# Allegro board PCB_ESP32-P4_HMI_SubBoard_V1.2_20240527.brd
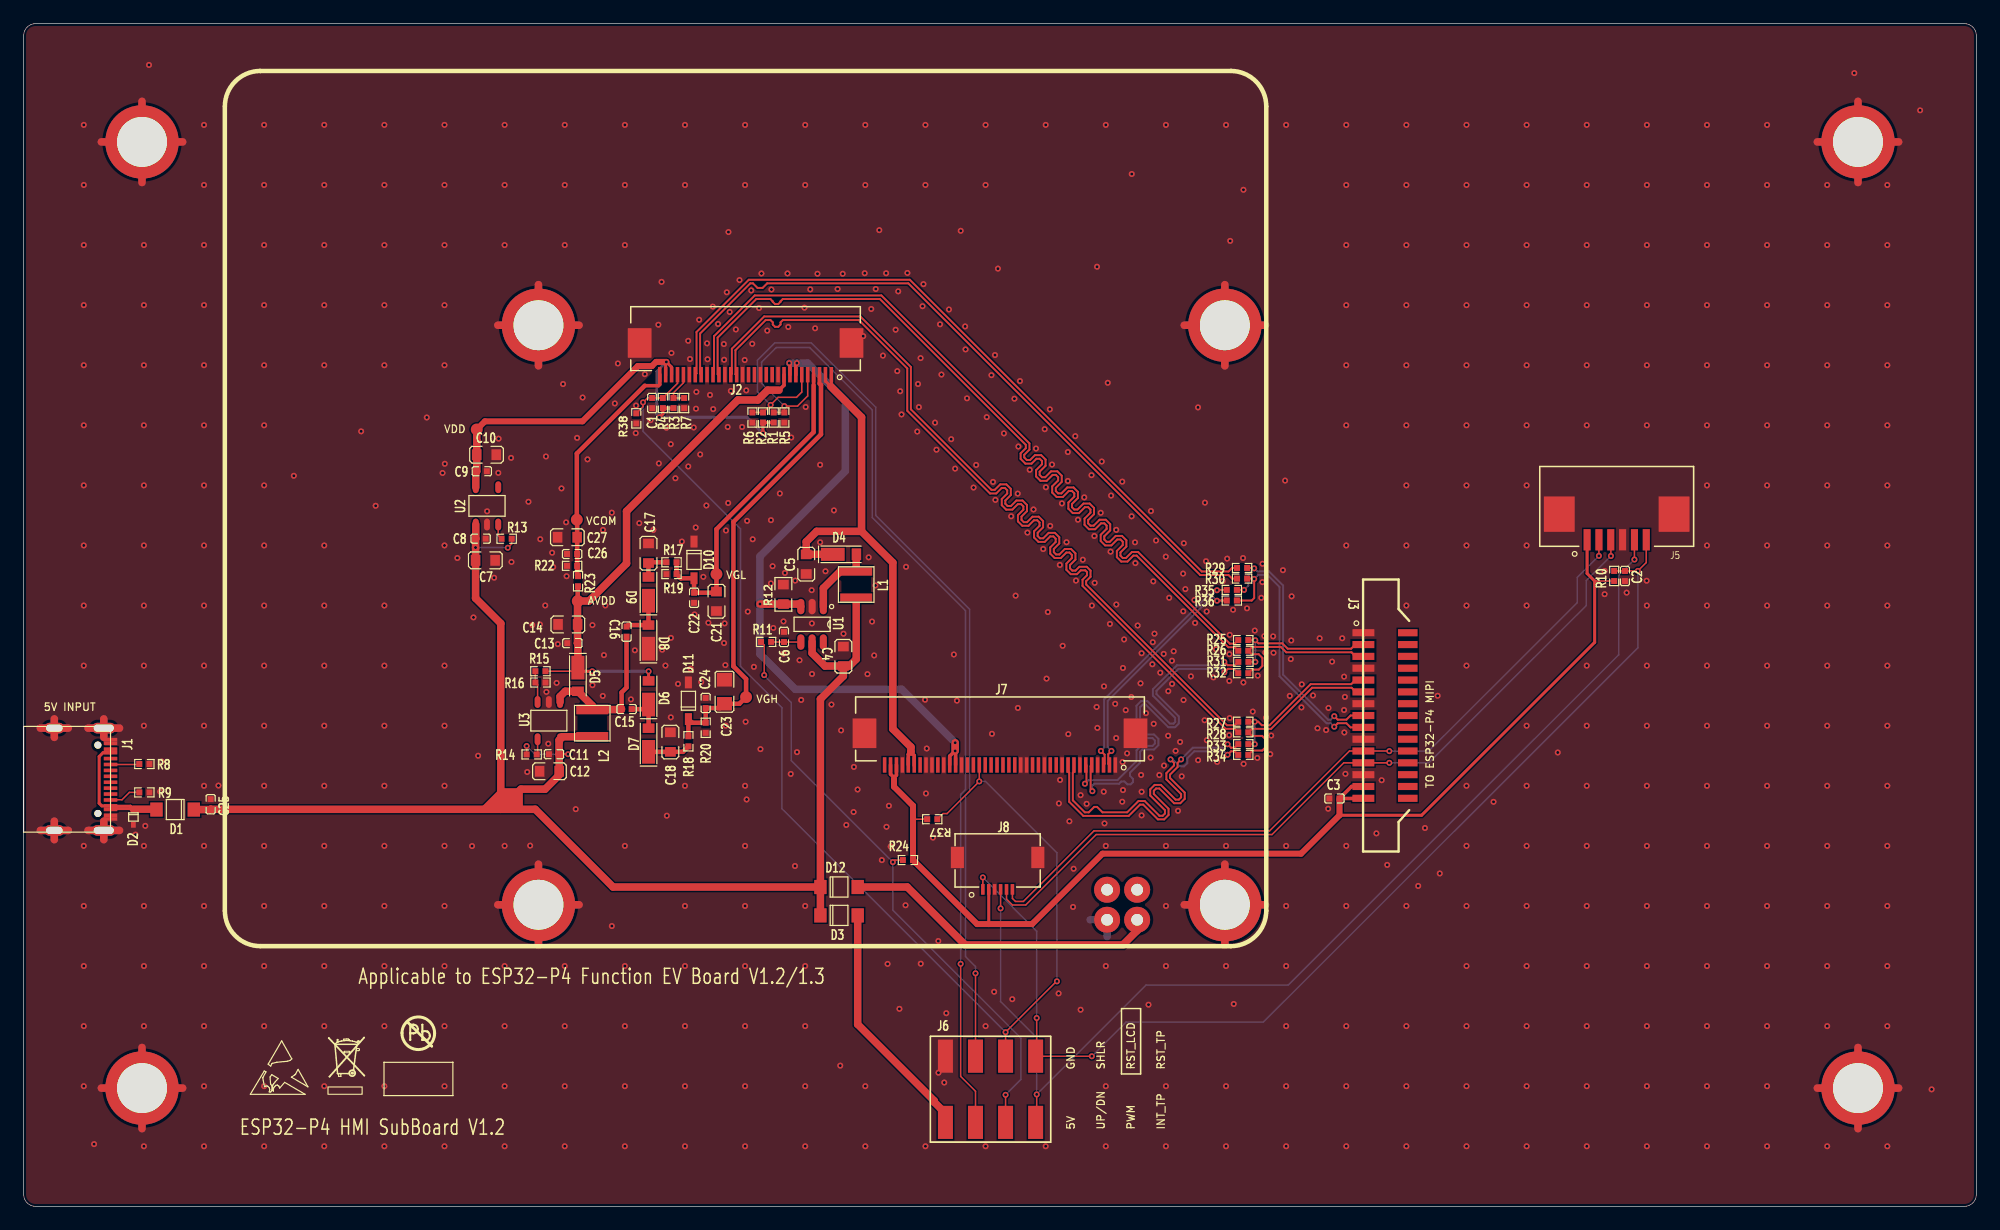
[diagram p0: board, top side]
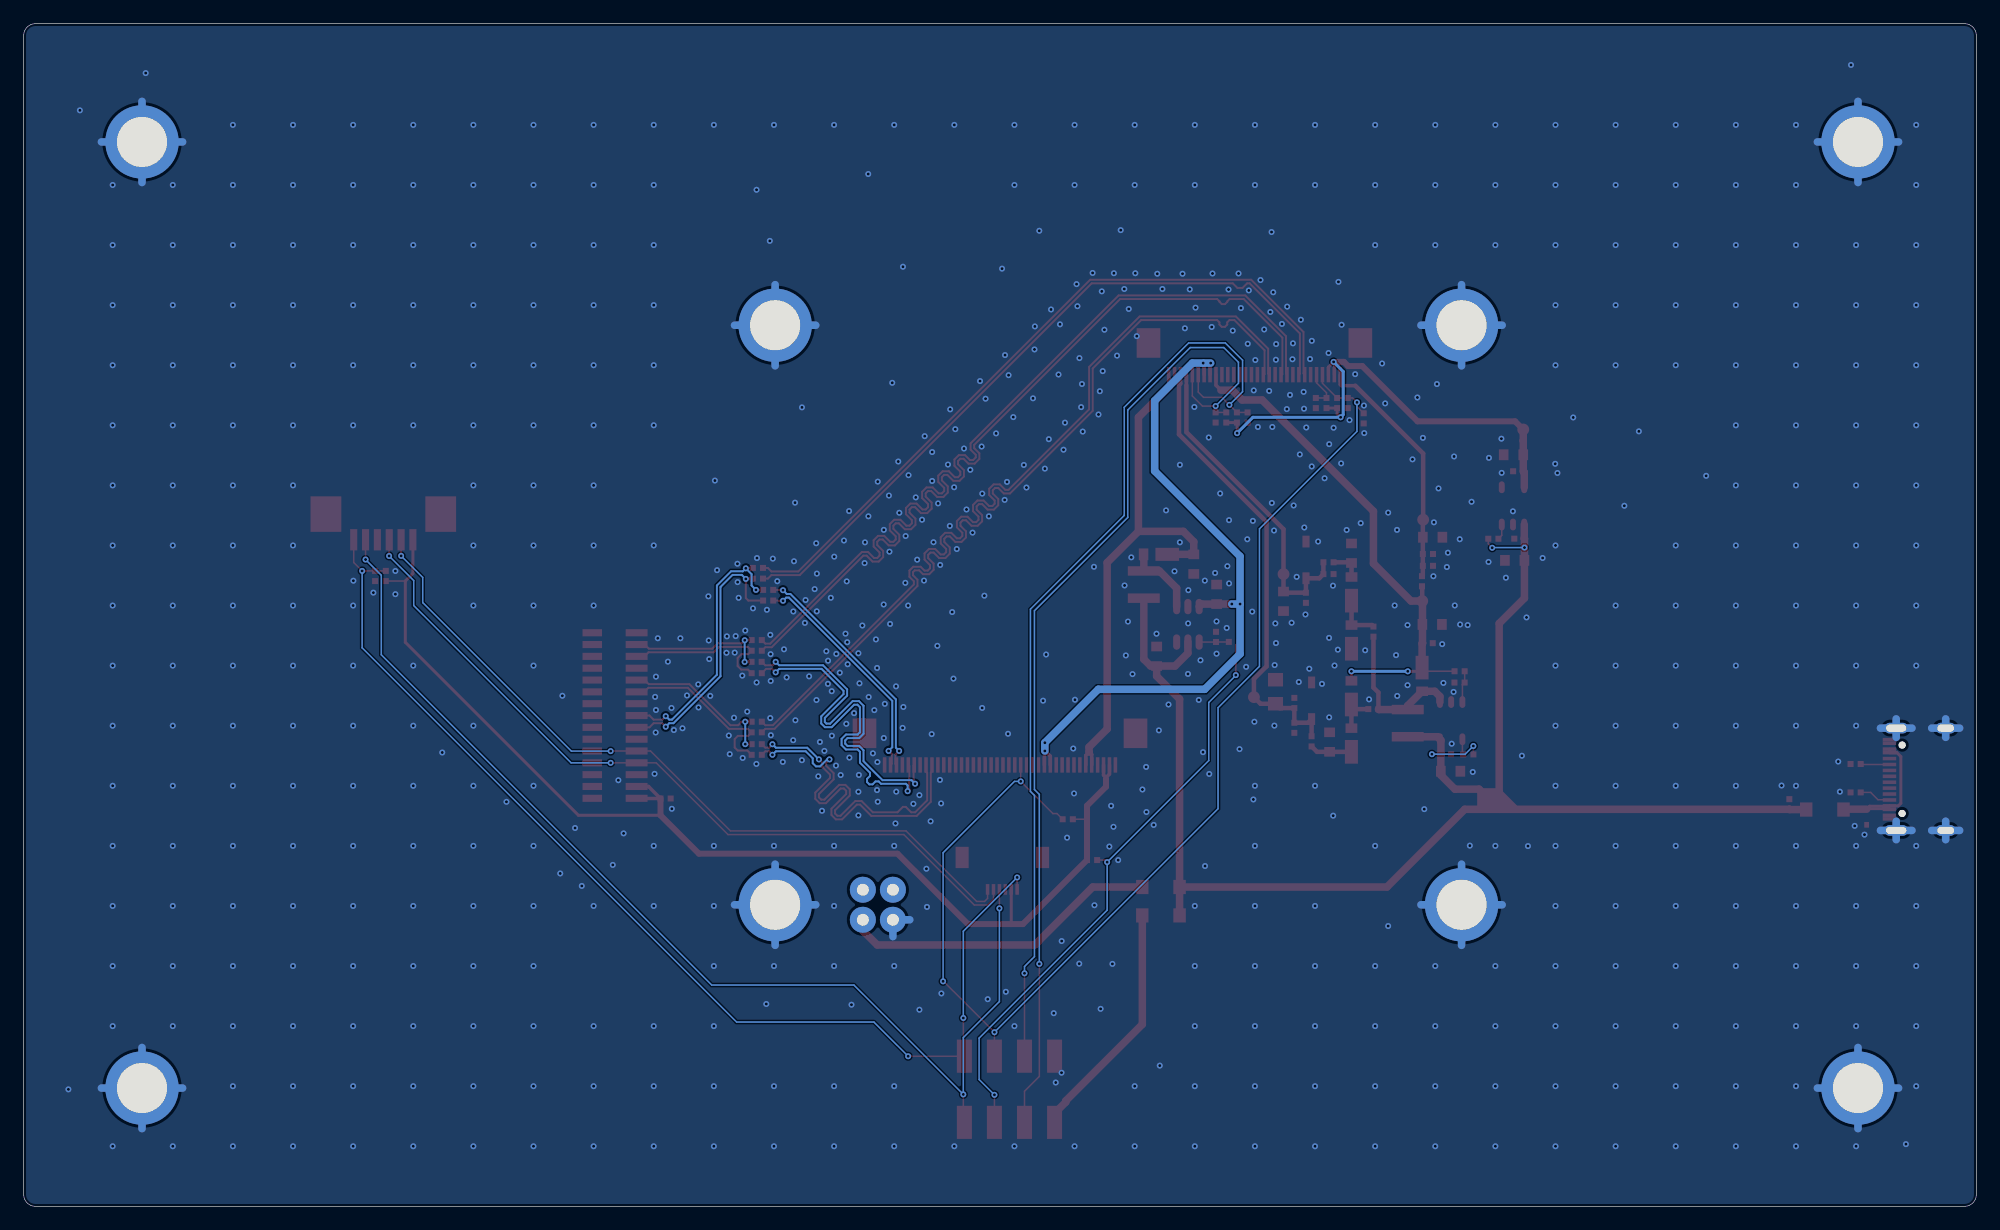
[diagram p1: board, bottom side, seen from below]

Outline 165 x 100 mm; copper layers: TOP, BOTTOM. Coordinates in mm from the lower left corner of the outline.
Outline path: 0,99 0,1 arc(0.29,0.29) 1,0 164,0 arc(164.71,0.29) 165,1 165,99 arc(164.71,99.71) 164,100 1,100 arc(0.29,99.71) 0,99

## Design rules (mm)
net group A_CLKN: nets A_CLKN B_CLKN ESP32_CLKN
net group A_CLKP: nets A_CLKP B_CLKP ESP32_CLKP
net group A_DATN0: nets A_DATN0 B_DATN0 ESP32_DATN0
net group A_DATN1: nets A_DATN1 B_DATN1 ESP32_DATN1
net group A_DATP0: nets A_DATP0 B_DATP0 ESP32_DATP0
net group A_DATP1: nets A_DATP1 B_DATP1 ESP32_DATP1

## Placement (name value [footprint] x y rotation side)
C1  1uF/16V(10%)(NC)  [C0402]  53.11 67.92 270 top
C2  1uF/16V(10%)  [C0402]  135.31 53.3 270 top
C3  0.1uF/50V(10%)  [C0402]  110.76 34.48 180 top
C4  10uF/25V(20%)  [C0603]  69.26 46.51 90 top
C5  10uF/25V(20%)  [C0603]  66.13 54.3 270 top
C6  22pF/50V(5%)  [C0402]  64.25 48.15 90 top
C7  10uF/25V(20%)  [C0603]  39.01 54.62 0 top
C8  0.1uF/50V(10%)  [C0402]  38.61 56.45 0 top
C9  0.1uF/50V(10%)  [C0402]  38.71 62.15 0 top
C10  10uF/25V(20%)  [C0603]  39.11 63.55 0 top
C11  0.1uF/50V(10%)  [C0402]  44.81 38.23 180 top
C12  10uF/25V(20%)  [C0603]  44.43 36.79 180 top
C13  0.1uF/50V(10%)  [C0402]  46.36 47.62 180 top
C14  10uF/25V(20%)  [C0603]  45.98 49.2 180 top
C15  0.1uF/50V(10%)  [C0402]  50.95 42.04 180 top
C16  0.1uF/50V(10%)  [C0402]  50.94 48.59 270 top
C17  1uF/50V(10%)  [C0603]  52.8 55.22 90 top
C18  1uF/50V(10%)  [C0603]  54.65 39.26 90 top
C21  10uF/25V(20%)  [C0603]  58.54 51.16 270 top
C22  0.1uF/50V(10%)  [C0402]  56.65 51.46 270 top
C23  10uF/50V(20%)  [C0805]  59.22 43.51 90 top
C24  0.1uF/50V(10%)  [C0402]  57.63 42.56 90 top
C25  0.1uF/50V(10%)  [C0402]  15.8 34 90 top
C26  0.1uF/50V(10%)  [C0402]  46.34 55.16 180 top
C27  10uF/25V(20%)  [C0603]  45.94 56.57 180 top
D1  DSS24  [SOD123FL]  12.8 33.55 180 top
D2  LESD5D5.0CT1G  [SOD523]  9.27 32.92 90 top
D3  DSS24  [SOD123FL]  68.9 24.6 0 top
D4  LMBR140ET1G  [SOD323HE]  69.37 55.13 180 top
D5  LMBR140ET1G  [SOD323HE]  46.83 44.55 90 top
D6  LMBR140ET1G  [SOD323HE]  52.8 43.43 270 top
D7  LMBR140ET1G  [SOD323HE]  52.8 39.43 270 top
D8  LMBR140ET1G  [SOD323HE]  52.8 48.15 270 top
D9  LMBR140ET1G  [SOD323HE]  52.8 52.21 270 top
D10  LMSZ5233BT1G  [SOD123]  56.64 54.66 270 top
D11  MM1W18  [SOD123]  56.17 42.75 90 top
D12  DSS24(NC)  [SOD123FL]  68.9 27 0 top
H1  STD  [HOLE6P2_4P22]  43.5 25.5 0 top
H2  STD  [HOLE6P2_4P22]  101.5 25.5 0 top
H3  STD  [HOLE6P2_4P22]  101.5 74.5 0 top
H4  STD  [HOLE6P2_4P22]  43.5 74.5 0 top
H5  STD  [HOLE6P2_4P22]  155 10 0 top
H6  STD  [HOLE6P2_4P22]  10 90 0 top
H7  STD  [HOLE6P2_4P22]  155 90 0 top
H8  STD  [HOLE6P2_4P22]  10 10 0 top
J1  -  [USB_TYPEC_16P_F]  6.27 36.11 270 top
J2  FPC_30P  [FFC30P_0P5]  61 73 180 top
J3  DSI_1-1734248-5  [FFC_15P_1_MIPI]  115.08 41.5 90 top
J5  FPC_6P  [FFC6P_1_UP]  134.61 58.53 180 top
J6  CON4X2  [CON4X2_2P54_SMT]  81.7 9.9 0 top
J7  FPC_40P(NC)  [FFC40P_0P5]  82.5 40 180 top
J8  FPC_6P(NC)  [FFC6P_0P5_UP]  82.3 29.5 180 top
L1  10uH(20%)_0.8A  [L3012S]  70.35 52.57 90 top
L2  10uH(20%)_0.8A  [L3012S]  48.05 40.85 90 top
R1  10K(1%)  [R0402]  63.38 66.7 270 top
R2  10K(1%)(NC)  [R0402]  62.48 66.7 270 top
R3  10K(1%)  [R0402]  54.91 67.92 270 top
R4  10K(1%)(NC)  [R0402]  54.01 67.92 270 top
R5  10K(1%)(NC)  [R0402]  64.28 66.7 90 top
R6  10K(1%)  [R0402]  61.58 66.7 90 top
R7  10K(1%)  [R0402]  55.81 67.92 90 top
R8  5.1K(1%)  [R0402]  10.2 37.4 180 top
R9  5.1K(1%)  [R0402]  10.2 35 180 top
R10  10K(1%)  [R0402]  134.4 53.3 270 top
R11  10K(1%)  [R0402]  62.74 47.73 180 top
R12  1.1(1%)  [R0603]  64.19 51.75 270 top
R13  10K(1%)  [R0402]  40.81 56.45 0 top
R14  10K(1%)  [R0402]  42.93 38.21 180 top
R15  22K(1%)  [R0402]  43.66 45.25 180 top
R16  3.3K(1%)  [R0402]  43.67 44.29 0 top
R17  220(1%)  [R0402]  54.74 54.46 0 top
R18  220(1%)  [R0402]  56.17 39.32 90 top
R19  51K(1%)  [R0402]  54.74 53.46 0 top
R20  51K(1%)  [R0402]  57.63 40.46 90 top
R22  1K(1%)  [R0402]  46.34 54.16 0 top
R23  2K(1%)  [R0402]  46.84 52.86 270 top
R24  10K(1%)  [R0402]  74.72 29.28 0 top
R25  0(1%)  [R0402]  103.06 47.88 0 top
R26  0(1%)  [R0402]  103.06 46.98 0 top
R27  0(1%)  [R0402]  103.06 40.98 0 top
R28  0(1%)  [R0402]  103.06 40.08 0 top
R29  0(1%)  [R0402]  102.96 53.98 0 top
R30  0(1%)  [R0402]  102.96 53.08 0 top
R31  0(1%)(NC)  [R0402]  103.07 46.04 0 top
R32  0(1%)(NC)  [R0402]  103.06 45.08 0 top
R33  0(1%)(NC)  [R0402]  103.06 39.08 0 top
R34  0(1%)(NC)  [R0402]  103.06 38.18 0 top
R35  0(1%)(NC)  [R0402]  102.09 52.12 0 top
R36  0(1%)(NC)  [R0402]  102.09 51.22 0 top
R37  1K(1%)(NC)  [R0402]  76.78 32.73 180 top
R38  10K(1%)  [R0402]  51.77 66.63 90 top
TP1  Test Point  [TPC1]  58.54 53.46 270 top
TP2  Test Point  [TPC1]  61.04 43.06 270 top
TP3  Test Point  [TPC1]  46.74 58.06 270 top
TP4  Test Point  [TPC1]  46.82 51.18 270 top
TP5  Test Point  [TPC1]  38.29 65.69 90 top
TP6  TEST_THP_CP  [HOLE2P2_1]  94.09 24.23 0 top
TP7  TEST_THP_CP  [HOLE2P2_1]  91.55 24.23 0 top
TP8  TEST_THP_CP  [HOLE2P2_1]  91.55 26.77 0 top
TP9  TEST_THP_CP  [HOLE2P2_1]  94.09 26.77 0 top
U1  ETA1611  [SOT23-6]  66.62 49.21 270 top
U2  ME6211C18M5G-N  [SOT23-5]  39.15 59.23 90 top
U3  AP3012K  [SOT23-5]  44.38 41.07 270 top

## Library data of the parts
C1 C2 = CAP
C3-C18 C21-C27 = CAPACITOR
D1 D3-D12 = DIODE_S
D2 = DIODE_BI_DIR
H1-H8 = STD
J1 = USB_TYPEC_16P_F
J2 = FPC_30P
J3 = DSI_1-1734248-5
J5 J8 = FPC_6P
J6 = CON4X2
J7 = FPC_40P
L1 L2 = INDUCTOR
R1-R20 R22-R24 R37 R38 = RESISTOR
R25-R30 = RESISTOR: signal model: RESISTOR_R0402_0(1%)_0(1%)
R31-R36 = RESISTOR: signal model: RESISTOR_R0402_0(1%)(NC)_0(1%)(NC)
TP1-TP9 = TEST POINT_0
U1 = ETA1611
U2 = LDO_SOT23-5_3
U3 = AP3012K

## Footprints (pads in the part's own frame, mm; a bottom-side part is the same pattern mirrored in y, then rotated)
C0402
  rect 0.508x0.508 smd: 1(-0.429,0) 2(0.429,0)
C0603
  rect 0.813x0.914 smd: 1(-0.826,0) 2(0.826,0)
C0805
  rect 1.143x1.27 smd: 1(-1.016,0) 2(1.016,0)
CON4X2_2P54_SMT
  rect 1.27x2.8 smd: 1(-3.81,-2.8) 2(-3.81,2.8) 3(-1.27,-2.8) 4(-1.27,2.8) 5(1.27,-2.8) 6(1.27,2.8) 7(3.81,-2.8) 8(3.81,2.8)
FFC6P_0P5_UP
  rect 0.3x0.9 smd: 1(1.25,2.7) 2(0.75,2.7) 3(0.25,2.7) 4(-0.25,2.7) 5(-0.75,2.7) 6(-1.25,2.7)
  rect 1.1x1.8 smd: 7(-3.4,0) 8(3.4,0)
FFC6P_1_UP
  rect 0.6x1.8 smd: 1(2.5,2.17) 2(1.5,2.17) 3(0.5,2.17) 4(-0.5,2.17) 5(-1.5,2.17) 6(-2.5,2.17)
  rect 2.6x3 smd: 7(-4.85,0) 8(4.85,0)
FFC30P_0P5
  rect 0.3x1.3 smd: 1(-7.25,2.68) 2(-6.75,2.68) 3(-6.25,2.68) 4(-5.75,2.68) 5(-5.25,2.68) 6(-4.75,2.68) 7(-4.25,2.68) 8(-3.75,2.68) 9(-3.25,2.68) 10(-2.75,2.68) 11(-2.25,2.68) 12(-1.75,2.68) 13(-1.25,2.68) 14(-0.75,2.68) 15(-0.25,2.68) 16(0.25,2.68) 17(0.75,2.68) 18(1.25,2.68) 19(1.75,2.68) 20(2.25,2.68) 21(2.75,2.68) 22(3.25,2.68) 23(3.75,2.68) 24(4.25,2.68) 25(4.75,2.68) 26(5.25,2.68) 27(5.75,2.68) 28(6.25,2.68) 29(6.75,2.68) 30(7.25,2.68)
  rect 2x2.5 smd: 31(-8.95,0) 32(8.95,0)
FFC40P_0P5
  rect 0.3x1.3 smd: 1(-9.75,2.68) 2(-9.25,2.68) 3(-8.75,2.68) 4(-8.25,2.68) 5(-7.75,2.68) 6(-7.25,2.68) 7(-6.75,2.68) 8(-6.25,2.68) 9(-5.75,2.68) 10(-5.25,2.68) 11(-4.75,2.68) 12(-4.25,2.68) 13(-3.75,2.68) 14(-3.25,2.68) 15(-2.75,2.68) 16(-2.25,2.68) 17(-1.75,2.68) 18(-1.25,2.68) 19(-0.75,2.68) 20(-0.25,2.68) 21(0.25,2.68) 22(0.75,2.68) 23(1.25,2.68) 24(1.75,2.68) 25(2.25,2.68) 26(2.75,2.68) 27(3.25,2.68) 28(3.75,2.68) 29(4.25,2.68) 30(4.75,2.68) 31(5.25,2.68) 32(5.75,2.68) 33(6.25,2.68) 34(6.75,2.68) 35(7.25,2.68) 36(7.75,2.68) 37(8.25,2.68) 38(8.75,2.68) 39(9.25,2.68) 40(9.75,2.68)
  rect 2x2.5 smd: 41(-11.45,0) 42(11.45,0)
FFC_15P_1_MIPI
  rect 0.6x1.85 smd: 1(7,1.875) 2(6,1.875) 3(5,1.875) 4(4,1.875) 5(3,1.875) 6(2,1.875) 7(1,1.875) 8(0,1.875) 9(-1,1.875) 10(-2,1.875) 11(-3,1.875) 12(-4,1.875) 13(-5,1.875) 14(-6,1.875) 15(-7,1.875)
  rect 0.6x1.65 smd: 16(7,-1.875) 17(6,-1.875) 18(5,-1.875) 19(4,-1.875) 20(3,-1.875) 21(2,-1.875) 22(1,-1.875) 23(0,-1.875) 24(-1,-1.875) 25(-2,-1.875) 26(-3,-1.875) 27(-4,-1.875) 28(-5,-1.875) 29(-6,-1.875) 30(-7,-1.875)
HOLE2P2_1
  round 2.2 hole 1: 1(0,0)
HOLE6P2_4P22
  round 6.2 hole 4.22: 1(0,0)
L3012S
  rect 0.8x2.7 smd: 1(-1.15,0) 2(1.15,0)
R0402
  rect 0.508x0.508 smd: 1(-0.429,0) 2(0.429,0)
R0603
  rect 0.813x0.914 smd: 1(-0.826,0) 2(0.826,0)
SOD123
  rect 1x0.6 smd: 1(1.55,0) 2(-1.55,0)
SOD123FL
  rect 1.05x1.2 smd: 1(1.575,0) 2(-1.575,0)
SOD323HE
  rect 0.8x1 smd: 1(-1,0)
  rect 2x1.1 smd: 2(1,0)
SOD523
  rect 0.48x0.4 smd: 1(-0.66,0) 2(0.66,0)
SOT23-5
  oval 1x0.5 smd: 1(-1.575,0.95) 2(-1.575,0) 3(-1.575,-0.95) 4(1.575,-0.95) 5(1.575,0.95)
SOT23-6
  oval 1.3x0.6 smd: 1(-1.5,0.95) 2(-1.5,0) 3(-1.5,-0.95) 4(1.5,-0.95) 5(1.5,0) 6(1.5,0.95)
TPC1
  round 1 smd: 1(0,0)
USB_TYPEC_16P_F
  round 0.6 hole 0.6 unplated: (-2.89,0) (2.89,0)
  rect 0.3x1.14 smd: 1(-3.35,1.07) 2(-3.05,1.07) 3(-2.55,1.07) 4(-2.25,1.07) 5(-1.75,1.07) 6(-1.25,1.07) 7(-0.75,1.07) 8(-0.25,1.07) 9(0.25,1.07) 10(0.75,1.07) 11(1.25,1.07) 12(1.75,1.07) 13(2.25,1.07) 14(2.55,1.07) 15(3.05,1.07) 16(3.35,1.07)
  oval 0.9x1.7 hole 0.6x1.4: 17(-4.325,-3.68) 20(4.325,-3.68)
  oval 0.9x2 hole 0.6x1.7: 18(-4.325,0.5) 19(4.325,0.5)

## Nets
GND: C1.2 C2.2 C3.2 C4.2 C5.2 C6.2 C7.2 C8.2 C9.2 C10.2 C11.2 C12.2 C13.2 C14.2 C17.2 C18.2 C21.2 C22.2 C23.2 C24.2 C25.2 C26.2 C27.2 D2.1 D8.2(K) D10.2(K) D11.1(A) H1.1 H2.1 H3.1 H4.1 H5.1 H6.1 H7.1 H8.1 J1.1(A1_G) J1.2(B12_G) J1.15(B1_G) J1.16(A12_G) J1.17(E_G1) J1.18(E_G2) J1.19(E_G3) J1.20(E_G4) J2.10 J2.13 J2.16 J2.19 J2.22 J2.25 J2.31 J2.32 J3.1(GND#1) J3.4(GND#4) J3.7(GND#7) J3.10(GND#10) J3.13(GND#13) J5.4 J5.7 J5.8 J6.2 J7.1 J7.4 J7.7 J7.10 J7.13 J7.16 J7.17 J7.27 J7.30 J7.32 J7.33 J7.37 J7.41 J7.42 J8.3 J8.7 J8.8 R5.1 R6.1 R7.1 R8.1 R9.1 R12.1 R16.2 R19.1 R20.1 R22.1 R38.1 TP7.1 U1.2(GND) U2.2(GND) U3.2(GND)
VCC_5V: C4.1 C7.1 C8.1 C11.1 C12.1 C25.1 D1.2(K) D3.2(K) D12.2(K) L1.1 L2.1 R13.2 R14.2 U1.5(IN) U2.1(VIN) U3.5(VIN)
VDD_3V3: C3.1 J3.14(3V3#14) J3.15(3V3#15) J5.1 J7.38 J7.39 J8.2 R10.2 R24.2 R37.2
A_CLKN: J2.18 R27.1
A_CLKP: J2.17 R28.1
A_DATN0: J2.24 R29.1
A_DATN1: J2.21 R25.1
A_DATP0: J2.23 R30.1
A_DATP1: J2.20 R26.1
B_CLKN: J7.9 R33.1
B_CLKP: J7.8 R34.1
B_DATN0: J7.3 R35.1
B_DATN1: J7.6 R31.1
B_DATP0: J7.2 R36.1
B_DATP1: J7.5 R32.1
ESP32_CLKN: J3.5(CLK_CN) R27.2 R33.2
ESP32_CLKP: J3.6(CLK_CP) R28.2 R34.2
ESP32_DATN0: J3.8(DN0) R29.2 R35.2
ESP32_DATN1: J3.2(DN1) R25.2 R31.2
ESP32_DATP0: J3.9(DP0) R30.2 R36.2
ESP32_DATP1: J3.3(DP1) R26.2 R32.2
ESP32_I2C_SCL: J3.11(SCL0) J5.2 J8.6
ESP32_I2C_SDA: J3.12(SDA0) J5.3 J8.5
INT_TP: J5.5 J6.7 J8.4
LCD_AVDD: C13.1 C14.1 D5.2(K) D6.1(A) J2.9 R15.1 R23.2 TP4.1
LCD_VCOM: C26.1 C27.1 J2.30 R22.2 R23.1 TP3.1
LCD_VDD: C9.1 C10.1 J2.28 J2.29 R1.2 R2.2 R3.2 R4.2 TP5.1 U2.5(OUT)
LCD_VGH: C23.1 C24.1 D11.2(K) J2.3 R18.2 R20.2 TP2.1
LCD_VGL: C21.1 C22.1 D10.1(A) J2.4 R17.2 R19.2 TP1.1
LED+: C5.1 D4.2(K) J2.1 J2.2 J7.35 J7.36
LED-: J2.7 J2.8 J7.28 J7.29 R12.2 U1.3(FB)
LED_CTRL: J6.5 R11.2 R24.1
RESET_LCD: C1.1 J2.27 J6.6 J7.24 R4.1 R37.1 R38.2
RESET_TP: C2.1 J5.6 J6.8 J8.1 R10.1
SHLR: J2.6 J6.4 R2.1 R6.2
STBYB: J2.26 R3.1 R7.2
UPDN: J2.5 J6.3 R1.1 R5.2
USB_5V: D1.1(A) D2.2 J1.3(A4_VBUS) J1.4(B9_VBUS) J1.13(B4_VBUS) J1.14(A9_VBUS)
N17127832: D4.1(A) L1.2 U1.1(SW)
N17127878: C6.1 R11.1 U1.4(EN)
N17128822: R13.1 U2.3(EN)
N17131715: J1.6(A5_CC1) R8.2
N17131721: J1.12(B5_CC2) R9.2
N17132617: D3.1(A) J6.1
N17134769: R14.1 U3.4(EN)
N17134948: C15.2 C16.2 D5.1(A) L2.2 U3.1(SW)
N17135258: R15.2 R16.1 U3.3(FB)
N17135942: C16.1 D8.1(A) D9.2(K)
N17136021: C15.1 D6.2(K) D7.1(A)
N17136250: C18.1 D7.2(K) R18.1
N17136498: C17.1 D9.1(A) R17.1
N17147084: D12.1(A) TP6.1

Pads without a net: J1 5 7 8 9 10 11; J2 11 12 14 15; J3 16 17 18 19 20 21 22 23 24 25 26 27 28 29 30; J7 11 12 14 15 18 19 20 21 22 23 25 26 31 34 40; TP8 1; TP9 1; U1 6; U2 4

## Via types
v1: diameter 0.508, hole 0.254, TOP to BOTTOM, 833 vias

## Routing (per net, layer and track width the routed paths; a pad name or vN(x,y) marks a point on that pad's centre or on a via; arc(x,y) is an arc through that point)
GND: length 255
  TOP w0.635: H4.1 43.5,77.93 ; H4.1 40.07,74.5 ; H4.1 43.5,71.07 ; H4.1 46.93,74.5 ; J1.20 2.59,32.57 ; J1.20 3.77,31.79 ; J1.20 1.41,31.79 ; J1.20 2.59,31 ; J1.18 6.77,41.22 ; J1.18 6.77,39.65 ; J1.18 5.44,40.44 ; J1.18 8.1,40.44 ; H3.1 104.93,74.5 ; H3.1 98.07,74.5 ; H3.1 101.5,77.93 ; H3.1 101.5,71.07 ; 6.57,10 H8.1 ; H8.1 10,6.57 ; H8.1 10,13.43 ; H8.1 13.43,10 ; 2.59,39.65 J1.17 ; J1.17 2.59,41.22 ; J1.17 3.77,40.44 ; J1.17 1.41,40.44 ; H1.1 43.5,28.93 ; H1.1 43.5,22.07 ; H1.1 40.07,25.5 ; H1.1 46.93,25.5 ; 155,86.57 H7.1 ; H7.1 158.43,90 ; H7.1 151.57,90 ; H7.1 155,93.43 ; J1.19 6.77,32.57 ; J1.19 8.1,31.79 ; J1.19 5.44,31.79 ; J1.19 6.77,31 ; H5.1 155,13.43 ; H5.1 151.57,10 ; H5.1 158.43,10 ; H5.1 155,6.57 ; 6.57,90 H6.1 ; H6.1 10,93.43 ; H6.1 10,86.57 ; H6.1 13.43,90 ; 98.07,25.5 H2.1 ; H2.1 104.93,25.5 ; H2.1 101.5,28.93 ; H2.1 101.5,22.07
  BOTTOM w0.635: J1.20 2.59,32.57 ; J1.20 1.41,31.79 ; J1.20 2.59,31 ; J1.20 3.77,31.79 ; 2.59,39.65 J1.17 ; J1.17 3.77,40.44 ; J1.17 2.59,41.22 ; J1.17 1.41,40.44 ; 5.44,31.79 J1.19 ; J1.19 6.77,31 ; J1.19 8.1,31.79 ; J1.19 6.77,32.57 ; H2.1 101.5,28.93 ; H2.1 98.07,25.5 ; H2.1 101.5,22.07 ; H2.1 104.93,25.5 ; 155,86.57 H7.1 ; H7.1 155,93.43 ; H7.1 158.43,90 ; H7.1 151.57,90 ; 10,86.57 H6.1 ; H6.1 6.57,90 ; H6.1 13.43,90 ; H6.1 10,93.43 ; H4.1 46.93,74.5 ; H4.1 43.5,71.07 ; H4.1 40.07,74.5 ; H4.1 43.5,77.93 ; H5.1 158.43,10 ; H5.1 155,6.57 ; H5.1 151.57,10 ; H5.1 155,13.43 ; H1.1 43.5,28.93 ; H1.1 40.07,25.5 ; H1.1 43.5,22.07 ; H1.1 46.93,25.5 ; H8.1 13.43,10 ; H8.1 6.57,10 ; H8.1 10,6.57 ; H8.1 10,13.43 ; 5.44,40.44 J1.18 ; J1.18 8.1,40.44 ; J1.18 6.77,41.22 ; J1.18 6.77,39.65 ; 101.5,71.07 H3.1 ; H3.1 101.5,77.93 ; H3.1 104.93,74.5 ; H3.1 98.07,74.5 ; 91.55,22.8 TP7.1 90.12,24.23
  vias: v1(5.08,91.44) v1(5.08,86.36) v1(5.08,81.28) v1(5.08,76.2) v1(5.08,71.12) v1(5.08,66.04) v1(5.08,60.96) v1(5.08,55.88) v1(5.08,50.8) v1(5.08,45.72) v1(5.08,30.48) v1(5.08,25.4) v1(5.08,20.32) v1(5.08,15.24) v1(5.08,10.16) v1(5.95,5.26) v1(9.45,31.43) v1(10.16,81.28) v1(10.16,76.2) v1(10.16,71.12) v1(10.16,66.04) v1(10.16,60.96) v1(10.16,55.88) v1(10.16,50.8) v1(10.16,45.72) v1(10.16,40.64) v1(10.16,30.48) v1(10.16,25.4) v1(10.16,20.32) v1(10.16,15.24) v1(10.16,5.08) v1(10.28,32.17) v1(10.59,96.51) v1(11.53,35.06) v1(11.67,37.61) v1(15.24,91.44) v1(15.24,86.36) v1(15.24,81.28) v1(15.24,76.2) v1(15.24,71.12) v1(15.24,66.04) v1(15.24,60.96) v1(15.24,55.88) v1(15.24,50.8) v1(15.24,45.72) v1(15.24,40.64) v1(15.24,35.56) v1(15.24,30.48) v1(15.24,25.4) v1(15.24,20.32) v1(15.24,15.24) v1(15.24,10.16) v1(15.24,5.08) v1(16.46,35.58) v1(20.32,91.44) v1(20.32,86.36) v1(20.32,81.28) v1(20.32,76.2) v1(20.32,71.12) v1(20.32,66.04) v1(20.32,60.96) v1(20.32,55.88) v1(20.32,50.8) v1(20.32,45.72) v1(20.32,40.64) v1(20.32,35.56) v1(20.32,30.48) v1(20.32,25.4) v1(20.32,20.32) v1(20.32,15.24) v1(20.32,10.16) v1(20.32,5.08) v1(22.83,61.77) v1(25.4,91.44) v1(25.4,86.36) v1(25.4,81.28) v1(25.4,76.2) v1(25.4,71.12) v1(25.4,55.88) v1(25.4,50.8) v1(25.4,45.72) v1(25.4,40.64) v1(25.4,35.56) v1(25.4,30.48) v1(25.4,25.4) v1(25.4,20.32) v1(25.4,15.24) v1(25.4,10.16) v1(25.4,5.08) v1(28.52,65.53) v1(29.74,59.23) v1(30.48,91.44) v1(30.48,86.36) v1(30.48,81.28) v1(30.48,76.2) v1(30.48,71.12) v1(30.48,50.8) v1(30.48,45.72) v1(30.48,40.64) v1(30.48,35.56) v1(30.48,30.48) v1(30.48,25.4) v1(30.48,20.32) v1(30.48,15.24) v1(30.48,10.16) v1(30.48,5.08) v1(34.06,66.7) v1(35.4,62.01) v1(35.56,91.44) v1(35.56,86.36) v1(35.56,81.28) v1(35.56,76.2) v1(35.56,71.12) v1(35.59,62.79) v1(35.56,55.88) v1(35.56,45.72) v1(35.56,40.64) v1(35.56,35.56) v1(35.56,30.48) v1(35.56,25.4) v1(35.56,20.32) v1(35.56,15.24) v1(35.56,10.16) v1(35.56,5.08) v1(36.65,54.82) v1(37.89,30.46) v1(38.01,49.8) v1(38.4,38.1) v1(39.16,58.77) v1(39.75,53.15) v1(40.13,64.91) v1(40.11,62.02) v1(40.64,91.44) v1(40.64,86.36) v1(40.64,81.28) v1(40.64,30.48) v1(40.64,20.32) v1(40.64,15.24) v1(40.64,10.16) v1(40.64,5.08) v1(41.19,63.29) v1(41.22,54.49) v1(42.55,36.73) v1(42.66,59.57) v1(42.8,30.5) v1(42.98,49.15) v1(43.62,49.2) v1(43.65,56.41) v1(44.13,63.4) v1(44.07,50.81) v1(44.17,43.5) v1(44.33,39.12) v1(44.65,55.27) v1(44.74,54.06) v1(45.03,44.26) v1(45.13,47.54) v1(45.45,60.7) v1(45.58,69.53) v1(45.72,91.44) v1(45.72,86.36) v1(45.72,81.28) v1(45.72,20.32) v1(45.72,15.24) v1(45.72,10.16) v1(45.72,5.08) v1(45.83,57.84) v1(45.88,53.28) v1(46.65,33.58) v1(46.77,64.98) v1(47.23,68.39) v1(47.65,63.16) v1(48.06,49.15) v1(48.06,44.07) v1(48.93,43.16) v1(48.95,57.2) v1(49.03,46.61) v1(49.15,50.81) v1(49.7,58.66) v1(49.7,23.7) v1(49.95,67.89) v1(50.21,71.27) v1(50.8,91.44) v1(50.8,86.36) v1(50.8,81.28) v1(50.8,30.48) v1(50.8,20.32) v1(50.8,15.24) v1(50.8,10.16) v1(50.8,5.08) v1(51.31,42.87) v1(51.64,47.02) v1(51.75,67.71) v1(51.72,65.38) v1(52.02,57.77) v1(52.49,70.36) v1(52.97,66.48) v1(53.21,57.19) v1(53.63,74.54) v1(53.67,62.82) v1(53.9,78.17) v1(53.95,47.07) v1(54.23,45.73) v1(54.31,65.83) v1(54.35,33.03) v1(54.37,52.48) v1(54.74,72.15) v1(54.68,64.44) v1(54.69,48.07) v1(54.68,41.35) v1(55.07,61.56) v1(55.29,44.18) v1(55.62,56.21) v1(55.88,91.44) v1(55.88,86.36) v1(55.88,35.56) v1(55.88,25.4) v1(55.88,20.32) v1(55.88,15.24) v1(55.88,10.16) v1(55.88,5.08) v1(56.15,73.18) v1(56.16,62.56) v1(56.3,71.64) v1(56.37,45.46) v1(56.62,65.86) v1(56.69,50.05) v1(56.84,68.87) v1(56.81,67.44) v1(56.79,57.4) v1(57.08,74.97) v1(57.17,63.58) v1(57.25,44.34) v1(57.43,53.23) v1(57.74,72.97) v1(57.69,59.26) v1(57.79,71.62) v1(57.86,49.35) v1(57.99,68.61) v1(58.23,76.08) v1(58.27,67.41) v1(58.68,74.61) v1(59.17,72.91) v1(59.19,71.58) v1(59.23,49.29) v1(59.18,47.63) v1(59.34,57.15) v1(59.29,45.77) v1(59.31,40.65) v1(59.41,77.29) v1(59.49,65.9) v1(59.53,59.47) v1(59.55,82.38) v1(59.66,75.62) v1(59.76,68.94) v1(60.18,74.14) v1(60.49,78.32) v1(60.71,65.9) v1(60.92,71.56) v1(60.96,91.44) v1(60.96,86.36) v1(61,40.98) v1(60.96,35.56) v1(60.96,30.48) v1(60.96,25.4) v1(60.96,20.32) v1(60.96,15.24) v1(60.96,10.16) v1(60.96,5.08) v1(61.06,68.99) v1(61.13,57.96) v1(61.09,34.4) v1(61.19,50.29) v1(61.48,77.44) v1(61.57,72.93) v1(61.6,56.4) v1(61.7,45.62) v1(62.14,75.95) v1(62.34,78.88) v1(62.26,38.66) v1(62.83,74.04) v1(63.15,58.02) v1(63.14,52.67) v1(63.19,77.52) v1(63.28,54.13) v1(63.35,48.91) v1(63.9,60.27) v1(64.2,49.46) v1(64.2,46.73) v1(64.32,53.56) v1(64.54,78.88) v1(64.61,74.35) v1(64.82,36.56) v1(64.86,65.01) v1(65.19,52.91) v1(65.17,28.77) v1(65.35,38.4) v1(65.56,46.17) v1(65.7,42.82) v1(66.04,91.44) v1(66.04,86.36) v1(65.98,75.99) v1(66.04,25.4) v1(66.04,20.32) v1(66.04,15.24) v1(66.04,10.16) v1(66.04,5.08) v1(66.08,67.59) v1(66.47,77.53) v1(66.58,52.1) v1(66.6,49.29) v1(66.62,45.02) v1(66.88,74.24) v1(67.08,78.85) v1(67.3,62.7) v1(67.3,56.15) v1(67.75,53.7) v1(68.26,42.43) v1(68.47,58.85) v1(68.78,77.56) v1(69,11.9) v1(69.07,40.24) v1(69.21,78.85) v1(69.27,48.42) v1(69.51,32.25) v1(70.13,33.34) v1(70.15,37.16) v1(70.47,35.25) v1(70.94,73.58) v1(71.12,91.44) v1(71.12,86.36) v1(71.07,78.9) v1(71.12,10.16) v1(71.12,5.08) v1(71.3,45) v1(71.4,54.87) v1(71.62,75.88) v1(71.69,49.45) v1(71.87,46.58) v1(72,77.56) v1(71.97,52.5) v1(72.3,82.54) v1(72.51,29.28) v1(72.61,71.93) v1(72.88,78.9) v1(72.91,32.09) v1(73,20.5) v1(73.11,33.87) v1(73.26,30.42) v1(73.68,74.12) v1(73.82,70.62) v1(73.9,77.36) v1(74,16.7) v1(74.06,68.92) v1(74.18,66.95) v1(74.52,25.46) v1(74.56,54.08) v1(74.68,78.92) v1(75.51,65.51) v1(75.58,69.53) v1(75.64,67.58) v1(75.79,71.72) v1(75.8,20.52) v1(76.03,77.98) v1(75.95,76.11) v1(76.2,91.44) v1(76.2,86.36) v1(76.17,42.84) v1(76.24,34.91) v1(76.2,5.08) v1(76.31,38.71) v1(76.83,31.17) v1(77.01,66.27) v1(77.13,63.98) v1(77.29,22.43) v1(77.3,11.3) v1(77.43,74.58) v1(77.55,70.33) v1(77.79,10.47) v1(77.96,16.33) v1(78.19,75.83) v1(78.38,64.87) v1(78.6,46.66) v1(78.71,62.38) v1(78.86,42.76) v1(79.18,82.49) v1(79.55,74.4) v1(79.59,72.45) v1(79.71,68.32) v1(80.27,60.78) v1(80.49,62.69) v1(81.28,91.44) v1(81.28,86.36) v1(81.28,15.24) v1(81.28,5.08) v1(81.38,66.73) v1(81.78,70.28) v1(81.82,39.96) v1(81.91,61.26) v1(82.01,18.14) v1(82.08,71.98) v1(82.11,59.73) v1(82.33,79.29) v1(82.83,65.36) v1(83.44,58.34) v1(83.54,17.52) v1(83.72,68.29) v1(83.82,51.63) v1(84,60.27) v1(84.01,42.14) v1(84.05,64.24) v1(84.19,69.78) v1(84.82,56.97) v1(85.01,62.28) v1(85.33,58.92) v1(85.54,64.08) v1(86.15,55.58) v1(86.28,65.71) v1(86.36,91.44) v1(86.38,60.8) v1(86.43,44.62) v1(86.36,5.08) v1(86.54,50.25) v1(86.71,67.39) v1(86.74,57.53) v1(86.9,62.72) v1(87.48,34.07) v1(87.45,18) v1(87.55,54.23) v1(87.58,36.06) v1(87.73,59.43) v1(87.79,47.4) v1(88.12,56.16) v1(88.23,63.78) v1(88.23,61.33) v1(88.27,39.93) v1(88.36,32.56) v1(88.72,28.55) v1(88.67,25.32) v1(88.86,65.12) v1(88.92,52.91) v1(89.09,58.05) v1(89.31,34.77) v1(89.31,16.62) v1(89.5,54.68) v1(89.62,59.94) v1(89.82,34.03) v1(90.23,61.82) v1(90.26,50.8) v1(90.47,56.68) v1(90.5,52.72) v1(90.7,79.45) v1(90.66,42.22) v1(90.73,40.46) v1(91.01,58.64) v1(91.1,62.98) v1(91.29,43.97) v1(91.27,35.06) v1(91.33,32.38) v1(91.44,91.44) v1(91.44,30.48) v1(91.44,20.32) v1(91.44,10.16) v1(91.44,5.08) v1(91.61,69.63) v1(91.84,55.36) v1(91.79,49.24) v1(91.89,60.1) v1(92.23,42.49) v1(92.32,57.2) v1(92.33,50.89) v1(92.32,39.6) v1(92.83,61.28) v1(92.83,34.21) v1(92.89,45.52) v1(92.86,37.57) v1(92.89,35.2) v1(92.99,47.93) v1(93.12,41.96) v1(93.24,38.3) v1(93.63,87.29) v1(93.62,58.34) v1(93.6,43.07) v1(93.91,56.14) v1(93.94,54.39) v1(94.13,49.11) v1(94.38,44.22) v1(94.43,36.48) v1(94.46,46.77) v1(94.46,35.06) v1(94.46,33.06) v1(94.83,41.7) v1(95.05,17.05) v1(95.23,37.94) v1(95.25,58.79) v1(95.41,47.7) v1(95.38,45.83) v1(95.45,52.84) v1(95.49,40.8) v1(95.55,48.42) v1(95.69,56.3) v1(96.04,45.12) v1(95.96,36.47) v1(96.33,46.71) v1(96.36,37.27) v1(96.52,91.44) v1(96.51,54.93) v1(96.52,30.48) v1(96.52,25.4) v1(96.52,20.32) v1(96.52,10.16) v1(96.52,5.08) v1(96.72,43.56) v1(96.71,39.79) v1(96.8,51.46) v1(97.03,46.13) v1(97.04,44.18) v1(97.17,46.93) v1(97.34,38.51) v1(97.54,33.45) v1(97.72,39.27) v1(97.85,36.36) v1(98.03,56.07) v1(97.97,53.5) v1(97.99,50.31) v1(98.01,42.81) v1(98.16,52.19) v1(98.63,44.81) v1(98.93,51.27) v1(98.99,49.33) v1(99.23,67.55) v1(99.24,37.72) v1(99.82,59.5) v1(99.79,41.1) v1(99.91,54.54) v1(99.96,50.3) v1(99.97,39.41) v1(100.53,44.72) v1(100.75,47.1) v1(100.85,37.58) v1(101.32,52.86) v1(101.6,91.44) v1(101.6,30.48) v1(101.6,20.32) v1(101.6,10.16) v1(101.6,5.08) v1(101.7,54.77) v1(101.91,48.32) v1(101.89,46.69) v1(101.88,44.42) v1(101.91,41.29) v1(101.86,39.84) v1(101.95,81.63) v1(102.2,50.44) v1(102.25,17.11) v1(103.04,54.81) v1(103.07,85.95) v1(103.07,44.3) v1(103.08,37.41) v1(103.37,50.56) v1(103.86,41.84) v1(104.03,48.68) v1(104.25,37.91) v1(104.28,44.87) v1(104.58,51.45) v1(104.69,54.33) v1(104.67,52.78) v1(104.84,48.22) v1(104.92,46.82) v1(104.98,41.31) v1(105.34,38.23) v1(105.42,39.81) v1(105.58,48.2) v1(105.61,46.8) v1(106.41,53.79) v1(106.59,61.37) v1(106.68,91.44) v1(106.68,30.48) v1(106.68,25.4) v1(106.68,20.32) v1(106.68,15.24) v1(106.68,10.16) v1(106.68,5.08) v1(106.98,43.16) v1(107.14,51.58) v1(107.11,47.85) v1(107.07,46.27) v1(108,44.13) v1(107.97,42.18) v1(108.95,43.2) v1(109.33,40.42) v1(109.51,48.03) v1(110.06,40.27) v1(110.23,33.62) v1(110.26,42.14) v1(110.56,46.06) v1(111.42,48.03) v1(111.57,44.79) v1(111.64,43.08) v1(111.57,41.97) v1(111.6,40.07) v1(111.69,36.57) v1(111.76,91.44) v1(111.76,86.36) v1(111.76,81.28) v1(111.76,76.2) v1(111.76,71.12) v1(111.76,66.04) v1(111.76,55.88) v1(111.76,30.48) v1(111.76,25.4) v1(111.76,15.24) v1(111.76,10.16) v1(111.76,5.08) v1(114.31,31.54) v1(114.75,36.03) v1(115.22,28.87) v1(116.84,91.44) v1(116.84,86.36) v1(116.84,81.28) v1(116.84,76.2) v1(116.84,71.12) v1(116.84,66.04) v1(116.84,60.96) v1(116.84,55.88) v1(116.84,50.8) v1(116.84,25.4) v1(116.84,15.24) v1(116.84,10.16) v1(116.84,5.08) v1(117.84,27.09) v1(118.41,31.99) v1(119.48,43.17) v1(119.66,28.15) v1(121.92,91.44) v1(121.92,86.36) v1(121.92,81.28) v1(121.92,76.2) v1(121.92,71.12) v1(121.92,66.04) v1(121.92,60.96) v1(121.92,55.88) v1(121.92,50.8) v1(121.92,45.72) v1(121.92,35.56) v1(121.92,30.48) v1(121.92,25.4) v1(121.92,20.32) v1(121.92,15.24) v1(121.92,10.16) v1(121.92,5.08) v1(124.2,34.2) v1(127,91.44) v1(127,86.36) v1(127,81.28) v1(127,76.2) v1(127,71.12) v1(127,66.04) v1(127,60.96) v1(127,55.88) v1(127,50.8) v1(127,40.64) v1(127,35.56) v1(127,30.48) v1(127,25.4) v1(127,20.32) v1(127,15.24) v1(127,10.16) v1(127,5.08) v1(129.63,38.37) v1(132.08,91.44) v1(132.08,86.36) v1(132.08,81.28) v1(132.08,76.2) v1(132.08,71.12) v1(132.08,66.04) v1(132.08,45.72) v1(132.08,40.64) v1(132.08,35.56) v1(132.08,30.48) v1(132.08,25.4) v1(132.08,20.32) v1(132.08,15.24) v1(132.08,10.16) v1(132.08,5.08) v1(133.59,53.72) v1(133.59,51.76) v1(135.45,51.89) v1(137.14,52.9) v1(137.16,91.44) v1(137.16,86.36) v1(137.16,81.28) v1(137.16,76.2) v1(137.16,71.12) v1(137.16,66.04) v1(137.16,50.8) v1(137.16,45.72) v1(137.16,40.64) v1(137.16,35.56) v1(137.16,30.48) v1(137.16,25.4) v1(137.16,20.32) v1(137.16,15.24) v1(137.16,10.16) v1(137.16,5.08) v1(142.24,91.44) v1(142.24,86.36) v1(142.24,81.28) v1(142.24,76.2) v1(142.24,71.12) v1(142.24,66.04) v1(142.24,60.96) v1(142.24,55.88) v1(142.24,50.8) v1(142.24,45.72) v1(142.24,40.64) v1(142.24,35.56) v1(142.24,30.48) v1(142.24,25.4) v1(142.24,20.32) v1(142.24,15.24) v1(142.24,10.16) v1(142.24,5.08) v1(147.32,91.44) v1(147.32,86.36) v1(147.32,81.28) v1(147.32,76.2) v1(147.32,71.12) v1(147.32,66.04) v1(147.32,60.96) v1(147.32,55.88) v1(147.32,50.8) v1(147.32,45.72) v1(147.32,40.64) v1(147.32,35.56) v1(147.32,30.48) v1(147.32,25.4) v1(147.32,20.32) v1(147.32,15.24) v1(147.32,10.16) v1(147.32,5.08) v1(152.4,86.36) v1(152.4,81.28) v1(152.4,76.2) v1(152.4,71.12) v1(152.4,66.04) v1(152.4,60.96) v1(152.4,55.88) v1(152.4,50.8) v1(152.4,45.72) v1(152.4,40.64) v1(152.4,35.56) v1(152.4,30.48) v1(152.4,25.4) v1(152.4,20.32) v1(152.4,15.24) v1(152.4,5.08) v1(154.69,95.82) v1(157.48,86.36) v1(157.48,81.28) v1(157.48,76.2) v1(157.48,71.12) v1(157.48,66.04) v1(157.48,60.96) v1(157.48,55.88) v1(157.48,50.8) v1(157.48,45.72) v1(157.48,40.64) v1(157.48,35.56) v1(157.48,30.48) v1(157.48,25.4) v1(157.48,20.32) v1(157.48,15.24) v1(157.48,5.08) v1(160.25,92.67) v1(161.22,9.89)
VCC_5V: length 134
  TOP w0.127: 38.19,55.7 v1(38.18,55.7) ; C11.1 v1(46,38.23) ; v1(40.91,55.69) 41.24,56.02 R13.2 ; R14.2 42.5,38.21 v1(42.5,38.92)
  TOP w0.635: 40.32,33.57 40.32,49.29 38.19,51.42 C7.1 38.19,56.45 C8.1 38.2,56.47 U2.1 ; 40.32,33.57 43.23,33.57 49.8,27 D12.2 ; 40.32,33.57 42.02,35.27 44.06,35.27 45.25,36.47 C12.1 45.25,38.22 C11.1 45.24,39.41 U3.5 45.54,39.7 L2.1 ; 40.32,33.57 C25.1 15.78,33.55 D1.2 ; D12.2 D3.2 ; D12.2 67.33,42.89 69.26,44.83 C4.1 ; C4.1 67.71,45.68 66.62,46.78 U1.5 ; C4.1 69.77,45.68 70.35,46.26 L1.1
  BOTTOM w0.127: v1(42.5,38.92) 43.19,38.23 v1(46,38.23) ; v1(40.91,55.69) 40.89,55.7 v1(38.18,55.7)
VDD_3V3: length 100.3
  TOP w0.127: 132.75,52.87 132.75,52.87 134.4,52.87 ; R37.2 75.15,32.73
  TOP w0.254: 111.19,33.07 118.12,33.07 132.75,47.69 132.75,52.87 132.11,53.51 J5.1 ; 81.55,23.87 J8.2
  TOP w0.3: 73.54,36.26 73.75,36.46 J7.38 ; 73.54,36.26 73.25,36.55 J7.39 ; 73.54,36.26 73.54,36.16 ; J3.15 113.19,34.48 C3.1 112.2,35.5 J3.14
  TOP w0.508: C3.1 111.19,33.07 107.94,29.82 91.16,29.82 85.21,23.87 80.56,23.87 R24.2 75.15,33.87 73.54,35.48 73.54,36.16
A_CLKN: length 73.1
  TOP w0.165: J2.18 59.84,70.41 59.84,72.51 62.57,75.24 70.7,75.24 74.97,70.97 74.97,67.39 81.78,60.58 82.05,60.58 82.52,61.04 83.04,61.04 83.41,60.67 83.41,60.15 82.95,59.68 82.95,59.41 83.15,59.22 83.42,59.22 83.88,59.68 84.41,59.68 84.78,59.31 84.78,58.78 84.32,58.32 84.32,58.04 84.51,57.85 84.78,57.85 85.25,58.31 85.77,58.31 86.15,57.94 86.15,57.41 85.68,56.95 85.68,56.68 85.88,56.49 86.15,56.49 86.61,56.95 87.14,56.95 87.51,56.58 87.51,56.05 87.05,55.59 87.05,55.31 87.24,55.12 87.51,55.12 87.98,55.58 88.5,55.58 88.88,55.21 88.88,54.68 88.41,54.22 88.41,53.95 88.61,53.75 88.88,53.75 89.2,54.08 89.83,54.08 90.15,53.76 90.15,53.23 89.78,52.86 89.78,52.58 101.68,40.68 102.33,40.68 R27.1
A_CLKP: length 73.3
  TOP w0.165: J2.17 60.19,70.32 60.15,70.36 60.15,72.39 62.7,74.94 63.1,74.94 63.3,74.74 63.3,74.56 63.49,74.36 63.77,74.36 63.96,74.56 63.96,74.74 64.15,74.94 70.57,74.94 74.67,70.84 74.67,67.27 81.65,60.28 82.18,60.28 82.64,60.74 82.92,60.74 83.11,60.55 83.11,60.27 82.65,59.81 82.65,59.28 83.02,58.91 83.55,58.91 84.01,59.37 84.28,59.37 84.47,59.18 84.47,58.91 84.01,58.44 84.01,57.92 84.38,57.55 84.91,57.55 85.37,58.01 85.65,58.01 85.84,57.81 85.84,57.54 85.38,57.08 85.38,56.55 85.75,56.18 86.28,56.18 86.74,56.64 87.01,56.64 87.21,56.45 87.21,56.18 86.74,55.71 86.74,55.19 87.11,54.81 87.64,54.81 88.1,55.28 88.38,55.28 88.57,55.08 88.57,54.81 88.11,54.35 88.11,53.82 88.48,53.45 89.01,53.45 89.33,53.77 89.7,53.77 89.85,53.63 89.85,53.36 89.47,52.98 89.47,52.46 101.55,40.38 102.33,40.38 R28.1
A_DATN0: length 61.5
  TOP w0.165: R29.1 102.11,53.98 101.81,53.68 99.55,53.68 74.88,78.35 61.27,78.35 56.86,73.93 56.86,70.43 J2.24
A_DATN1: length 74.3
  TOP w0.165: J2.21 58.33,70.4 58.33,73.58 61.78,77.02 72.48,77.02 84.99,64.51 84.99,63.98 84.55,63.54 84.55,63.32 84.77,63.1 85.04,63.1 85.45,63.52 85.98,63.52 86.35,63.14 86.35,62.62 85.85,62.12 85.85,61.84 86.05,61.65 86.32,61.65 86.82,62.15 87.35,62.15 87.72,61.78 87.72,61.25 87.22,60.75 87.22,60.48 87.41,60.28 87.68,60.28 88.18,60.79 88.71,60.79 89.08,60.41 89.08,59.89 88.58,59.39 88.58,59.11 88.78,58.92 89.05,58.92 89.55,59.42 90.08,59.42 90.45,59.05 90.45,58.52 89.95,58.02 89.95,57.75 90.14,57.55 90.41,57.55 90.92,58.06 91.44,58.06 91.81,57.68 91.81,57.16 91.31,56.66 91.31,56.38 91.51,56.19 91.78,56.19 92.28,56.69 92.81,56.69 93.18,56.32 93.18,55.79 92.68,55.29 92.68,55.02 92.87,54.82 93.14,54.82 93.65,55.32 94.17,55.32 101.92,47.58 102.33,47.58 R25.1
A_DATP0: length 61.3
  TOP w0.165: J2.23 57.16,70.41 57.16,73.8 61.4,78.04 61.62,78.04 62.01,77.65 62.44,77.65 62.83,78.04 74.75,78.04 99.42,53.38 101.81,53.38 102.11,53.08 R30.1
A_DATP1: length 74.3
  TOP w0.165: J2.20 58.68,70.32 58.64,70.36 58.64,73.45 61.91,76.72 63.1,76.72 63.29,76.52 63.29,76.48 63.49,76.29 63.76,76.29 63.95,76.48 63.95,76.52 64.15,76.72 72.35,76.72 84.68,64.38 84.68,64.11 84.24,63.67 84.24,63.2 84.64,62.8 85.17,62.8 85.58,63.21 85.85,63.21 86.05,63.02 86.05,62.74 85.55,62.24 85.55,61.72 85.92,61.35 86.44,61.35 86.95,61.85 87.22,61.85 87.41,61.65 87.41,61.38 86.91,60.88 86.91,60.35 87.28,59.98 87.81,59.98 88.31,60.48 88.58,60.48 88.78,60.29 88.78,60.01 88.28,59.51 88.28,58.99 88.65,58.61 89.18,58.61 89.68,59.12 89.95,59.12 90.14,58.92 90.14,58.65 89.64,58.15 89.64,57.62 90.01,57.25 90.54,57.25 91.04,57.75 91.32,57.75 91.51,57.56 91.51,57.28 91.01,56.78 91.01,56.26 91.38,55.88 91.91,55.88 92.41,56.39 92.68,56.39 92.87,56.19 92.87,55.92 92.37,55.42 92.37,54.89 92.75,54.52 93.27,54.52 93.77,55.02 94.05,55.02 101.79,47.28 102.33,47.28 R26.1
B_CLKN: length 28.9
  TOP w0.165: v1(101.73,39.07) 102.02,38.78 102.33,38.78 R33.1 ; v1(97.8,37.79) 97.51,37.5 97.51,37.15 96.86,36.5 96.86,36.23 98.11,34.98 98.11,34.46 97.74,34.08 97.21,34.08 95.96,35.33 95.69,35.33 95.5,35.14 95.5,34.86 96.74,33.62 96.74,33.09 96.37,32.72 95.85,32.72 94.6,33.97 94.33,33.97 93.37,33.01 89.54,33.01 88.35,34.21 88.35,36.67 88.25,36.77 J7.9
  BOTTOM w0.165: v1(97.8,37.79) 98.79,38.78 101.44,38.78 v1(101.73,39.07)
B_CLKP: length 29.7
  TOP w0.165: v1(101.73,38.18) 102.02,38.47 102.33,38.47 R34.1 ; v1(96.91,37.79) 97.2,37.5 97.2,37.27 96.56,36.63 96.56,36.1 97.8,34.86 97.8,34.58 97.61,34.39 97.34,34.39 96.09,35.64 95.56,35.64 95.19,35.26 95.19,34.74 96.44,33.49 96.44,33.22 96.24,33.02 95.97,33.02 94.73,34.27 94.2,34.27 93.25,33.32 91.16,33.32 90.7,33.78 90.46,33.78 90,33.32 89.67,33.32 88.65,34.33 88.65,36.65 88.75,36.75 J7.8
  BOTTOM w0.165: v1(96.91,37.79) 97.11,37.79 97.7,37.2 98.06,37.2 98.33,37.47 98.33,37.88 98.92,38.47 101.44,38.47 v1(101.73,38.18)
B_DATN0: length 20
  TOP w0.165: J7.3 91.34,37.41 91.34,38.19 v1(91.02,38.51) ; R35.1 100.86,52.12 v1(100.84,52.09)
  BOTTOM w0.165: v1(100.84,52.09) 100.52,51.78 100.21,51.78 91.3,42.87 91.3,38.78 v1(91.02,38.51)
B_DATN1: length 30.2
  TOP w0.165: v1(89.68,35.73) 89.8,35.86 89.8,37.27 J7.6 ; v1(101.46,46.04) 101.74,45.75 102.34,45.75 R31.1
  BOTTOM w0.165: v1(101.46,46.04) 101.17,45.75 97.45,45.75 95.42,43.71 95.42,43.19 97.3,41.3 97.3,40.95 97.17,40.82 96.85,40.82 94.95,42.72 94.42,42.72 94.03,42.33 94.03,39.96 94.4,39.59 95.39,39.59 95.58,39.4 95.58,39.12 95.39,38.93 94.4,38.93 94.03,38.56 94.03,37.64 92.42,36.03 89.97,36.03 v1(89.68,35.73)
B_DATP0: length 19.5
  TOP w0.165: J7.2 91.65,37.42 91.65,38.24 v1(91.91,38.51) ; v1(100.84,51.2) 100.85,51.22 R36.1
  BOTTOM w0.165: v1(91.91,38.51) 91.6,38.82 91.6,42.74 100.34,51.47 100.57,51.47 v1(100.84,51.2)
B_DATP1: length 31.7
  TOP w0.165: J7.5 90.16,37.23 90.16,35.25 v1(90.31,35.1) ; R32.1 102.27,45.44 101.75,45.45 v1(101.46,45.15)
  BOTTOM w0.165: v1(101.46,45.15) 101.16,45.45 97.58,45.45 95.72,43.59 95.72,43.31 97.61,41.43 97.61,40.82 97.3,40.51 96.73,40.51 94.82,42.42 94.55,42.42 94.34,42.2 94.34,40.09 94.53,39.9 95.51,39.9 95.89,39.52 95.89,39 95.51,38.63 94.53,38.63 94.34,38.43 94.34,37.51 93.49,36.67 93.49,36.39 93.73,36.15 93.73,35.87 93.54,35.68 93.27,35.68 93.02,35.93 92.75,35.93 92.55,35.73 90.44,35.73 90.31,35.59 v1(90.31,35.1)
ESP32_CLKN: length 13.9
  TOP w0.165: R33.2 v1(104.03,39.08) ; R27.2 v1(104.03,40.98) 104.33,40.98 104.62,40.68 105.28,40.68 108.75,44.15 112.18,44.15 112.53,44.5 J3.5
  BOTTOM w0.165: v1(104.03,40.98) 104.03,40.97 v1(104.03,39.08)
ESP32_CLKP: length 15.5
  TOP w0.165: 103.49,40.07 103.8,40.38 105.4,40.38 108.87,43.85 112.21,43.85 112.56,43.5 J3.6 ; 103.49,40.07 103.78,39.78 104.65,39.78 104.92,39.51 104.92,38.8 104.66,38.54 103.85,38.54 R34.2 ; 103.49,40.07 R28.2
ESP32_DATN0: length 22.7
  TOP w0.165: v1(103.98,53.94) 103.94,53.98 R29.2 ; v1(103.12,52.12) R35.2 ; J3.8 112.12,41.5 111.77,41.15 111.04,41.15 v1(110.75,41.45)
  BOTTOM w0.165: v1(103.12,52.12) 103.49,52.49 103.49,53.46 v1(103.98,53.94) 104.23,53.69 105.22,53.69 106.42,52.49 106.42,44.95 110.22,41.15 110.45,41.15 v1(110.75,41.45)
ESP32_DATN1: length 12.6
  TOP w0.165: v1(104.08,46.03) 104.07,46.04 R31.2 ; R25.2 103.5,47.87 v1(104.07,47.87) 104.33,47.6 106.36,47.6 106.81,47.15 112.17,47.15 112.52,47.5 J3.2
  BOTTOM w0.165: v1(104.08,46.03) 104.08,47.86 v1(104.07,47.87)
ESP32_DATP0: length 23.1
  TOP w0.165: J3.9 112.12,40.5 111.77,40.85 111.04,40.85 v1(110.75,40.55) ; R30.2 103.95,53.08 v1(103.98,53.05) 103.98,51.43 103.77,51.22 R36.2
  BOTTOM w0.165: v1(110.75,40.55) 110.45,40.85 110.09,40.85 106.12,44.82 106.12,52.37 105.1,53.39 104.31,53.39 v1(103.98,53.05)
ESP32_DATP1: length 13.7
  TOP w0.165: R32.2 103.79,45.38 104.37,45.38 104.67,45.69 104.67,46.37 104.36,46.68 103.78,46.68 R26.2 103.81,47.3 106.23,47.3 106.68,46.85 112.2,46.85 112.55,46.5 J3.3
ESP32_I2C_SCL: length 65.1
  TOP w0.127: v1(133.1,55) 133.1,56.35 J5.2 ; v1(115.4,38.49) 115.39,38.5 J3.11 112.03,38.5 105.28,31.75 90.44,31.75 84.47,25.78 83.8,25.78 83.55,26.04 J8.6
  BOTTOM w0.127: v1(115.4,38.49) 118.72,38.49 131.28,51.05 131.28,53.17 v1(133.1,55)
ESP32_I2C_SDA: length 66.9
  TOP w0.127: v1(134.12,54.99) 134.12,56.35 J5.3 ; v1(115.4,37.5) J3.12 111.55,37.5 105.48,31.43 90.63,31.43 84.67,25.48 83.55,25.48 83.05,25.98 J8.5
  BOTTOM w0.127: v1(115.4,37.5) 118.74,37.5 132.04,50.8 132.04,52.91 v1(134.12,54.99)
INT_TP: length 95.9
  TOP w0.127: v1(85.6,9.46) 85.6,7.19 J6.7 ; J5.5 v1(136.11,54.69) ; J8.4 v1(82.55,25.2)
  BOTTOM w0.127: v1(82.55,25.2) 82.55,17.32 85.6,14.27 85.6,9.47 ; 85.6,9.47 v1(85.6,9.46) ; 85.6,9.47 94.84,18.71 106.85,18.71 134.78,46.64 134.78,53.36 v1(136.11,54.69)
LCD_AVDD: length 45.2
  TOP w0.127: R15.1 46.53,45.25 D5.2 ; C14.1 46.8,49.2
  TOP w0.254: D6.1 v1(52.8,45.24) ; D5.2 47.15,45.24 v1(48.04,45.24)
  TOP w0.3: J2.9 64.25,69.43 63.83,69.01
  TOP w0.381: R23.2 46.82,52.41 TP4.1
  TOP w0.635: D5.2 46.83,47.58 C13.1 46.8,47.63 46.8,51.16 TP4.1 47.77,51.18 50.94,54.36 50.94,58.77 60.35,68.18 62.04,68.18 62.87,69.01 63.83,69.01
  BOTTOM w0.254: v1(52.8,45.24) v1(48.04,45.24)
LCD_VCOM: length 20.7
  TOP w0.3: 52.48,69.39 53.65,69.39 53.75,69.49 J2.30
  TOP w0.381: R23.1 46.77,53.36 R22.2 C26.1 46.77,55.16 C27.1 46.77,58.03 TP3.1 46.74,63.65 52.48,69.39
LCD_VDD: length 43.7
  TOP w0.254: J2.29 54.25,71.34 v1(54.31,71.4) 54.75,70.96 J2.28 ; R1.2 R2.2 62.47,66.26 v1(62.47,65.38) ; R3.2 R4.2 54.01,67.01 v1(53.72,66.72)
  TOP w0.508: v1(54.31,71.4) 53.44,71.4 53.09,71.05 51.89,71.05 47.22,66.38 38.98,66.38 TP5.1
  TOP w0.635: TP5.1 38.29,64.74 38.29,64.74 C10.1 38.28,63.55 C9.1 38.2,62.07 U2.5
  BOTTOM w0.254: v1(62.47,65.38) 61.13,66.72 v1(53.72,66.72) 53.5,66.94 53.5,70.59 v1(54.31,71.4)
LCD_VGH: length 38.9
  TOP w0.3: 67.25,69.57 J2.3
  TOP w0.381: 67.25,69.57 67.37,69.44 67.37,65.27 59.98,57.87 59.98,45.66 61.04,44.59 TP2.1 60.48,42.49 C23.1 58.85,42.13 C24.1 57.63,42.13 R20.2 56.48,40.89 D11.2 R18.2
LCD_VGL: length 27.5
  TOP w0.3: 66.75,69.41 J2.4
  TOP w0.381: R17.2 R19.2 55.52,53.11 D10.1 56.65,53.1 C22.1 58.45,51.88 58.54,51.98 C21.1 TP1.1 58.54,57.26 66.75,65.46 66.75,69.41
LED+: length 46.7
  TOP w0.254: J2.1 68.25,69.37 68.2,69.32 67.75,69.77 J2.2
  TOP w0.3: J7.35 75.25,38.13 74.96,38.42 74.75,38.21 J7.36
  TOP w0.635: 70.8,57.07 67.01,57.07 66.13,56.19 C5.1 66.13,55.13 D4.2 ; 70.8,57.07 70.8,66.72 68.2,69.32 ; 70.8,57.07 73.45,54.43 73.45,40.36 74.98,38.83 74.98,38.44 74.96,38.42
LED-: length 60.3
  TOP w0.3: v1(64.7,71.3) 64.75,71.25 J2.8 ; J7.28 78.75,38.47 v1(78.71,38.51) 78.69,38.51 78.25,38.07 J7.29 ; J2.7 65.25,71.22 65.33,71.3 v1(65.33,71.3)
  TOP w0.635: U1.3 65.46,50.92 R12.2 64.19,50.93 v1(62.91,50.93) v1(62.21,50.93) ; v1(78.71,38.51) v1(78.71,39.2)
  BOTTOM w0.635: v1(62.21,50.93) 62.21,54.96 69.43,62.17 69.43,68.12 66.25,71.3 v1(65.33,71.3) v1(64.7,71.3) ; v1(62.21,50.93) v1(62.91,50.93) ; v1(62.21,50.93) 62.21,46.71 65.2,43.72 74.2,43.72 v1(78.71,39.2) v1(78.71,38.51)
LED_CTRL: length 51.2
  TOP w0.127: R11.2 62.58,47.46 v1(62.58,44.92) ; J6.5 v1(82.97,9.43) ; R24.1 73.62,29.28 v1(73.45,29.11)
  BOTTOM w0.127: v1(62.58,44.92) 62.58,44.89 64.86,42.6 64.86,37.69 v1(73.45,29.11) 73.45,25.05 84.27,14.23 84.27,10.72 v1(82.97,9.43)
RESET_LCD: length 105.7
  TOP w0.127: J6.6 v1(82.97,14.72) 87.27,19.02 v1(87.31,19.02) ; R38.2 52.34,67.63 v1(52.34,67.98) 52.71,68.35 C1.1 R4.1 55.25,69.59 J2.27 ; J7.24 v1(80.75,35.93) 78.03,33.21 77.68,33.21 R37.1
  BOTTOM w0.127: v1(82.97,14.72) 64.07,33.62 64.07,42.16 60.58,45.66 60.58,57.29 52.34,65.53 v1(52.34,67.98) ; v1(80.75,35.93) 81.28,35.93 87.31,29.9 v1(87.31,19.02)
RESET_TP: length 94.7
  TOP w0.127: J5.6 137.11,54.44 v1(136.4,53.73) C2.1 134.4,53.73 R10.1 ; J8.1 v1(81.05,27.81) ; v1(90.26,12.69) 85.52,12.69 J6.8 85.6,12.79 v1(85.6,15.93)
  BOTTOM w0.127: v1(85.6,15.93) 85.6,23.26 v1(81.05,27.81) ; v1(136.4,53.73) 136.4,47.23 104.75,15.58 93.15,15.58 v1(90.26,12.69)
SHLR: length 82.1
  TOP w0.127: R6.2 R2.1 63.12,67.77 v1(63.12,67.77) 63.75,68.4 65.3,68.4 65.75,68.85 J2.6 ; J6.4 v1(80.43,19.7)
  BOTTOM w0.127: v1(63.12,67.77) 62,68.88 62,71.55 63.46,73 66.56,73 72,67.56 72,58.42 79.93,50.49 79.93,35.09 79.59,34.75 79.59,21.12 80.43,20.28 v1(80.43,19.7)
STBYB: length 3.2
  TOP w0.127: R7.2 R3.1 54.91,68.8 55.75,69.63 J2.26
UPDN: length 86.3
  TOP w0.127: R1.1 R5.2 v1(64.28,67.66) 65.39,67.66 66.25,68.52 J2.5 ; v1(79.17,20.5) 79.17,10.99 80.43,9.73 J6.3
  BOTTOM w0.127: v1(79.17,20.5) 79.17,34.83 79.59,35.25 79.59,50.36 71.7,58.25 71.7,67.33 66.42,72.61 63.59,72.61 62.35,71.38 62.35,69.59 v1(64.28,67.66)
USB_5V: length 12.3
  TOP w0.254: J1.14 7.41,33.63 9.22,33.63 ; 9.22,33.63 9.02,33.83 7.37,33.83 J1.13 6.6,33.86 6.38,34.08 6.38,38.03 6.71,38.36 J1.4 J1.3 ; 9.22,33.63 D2.2
  TOP w0.635: D2.2 11.2,33.58 11.22,33.55
N17127832: length 6.3
  TOP w0.635: D4.1 70.35,55.11 L1.2 69.03,53.72 67.57,52.27 U1.1
N17127878: length 2.5
  TOP w0.127: R11.1 63.17,47.72 C6.1 64.25,47.71 U1.4
N17128822: length 1.3
  TOP w0.127: R13.1 40.1,56.73 U2.3
N17131715: length 2.4
  TOP w0.127: 9.77,37.4 9.73,37.36 J1.6
N17131721: length 2.7
  TOP w0.127: J1.12 7.36,34.38 8.31,34.38 8.93,35 9.77,35
N17132617: length 20.6
  TOP w0.635: J6.1 77.89,7.87 76.94,8.81 76.94,8.92 70.47,15.39 D3.1
N17134769: length 1.3
  TOP w0.127: R14.1 43.43,38.28 U3.4
N17134948: length 13
  TOP w0.381: C16.2 50.94,43.87 50.52,43.45 50.52,42.05 C15.2
  TOP w0.635: C15.2 50.48,42 L2.2 48.05,42.34 D5.1 45.77,43.55 45.33,43.11 U3.1
N17135258: length 2.7
  TOP w0.127: R15.2 43.23,44.3 R16.1 43.43,44.1 U3.3
N17135942: length 4
  TOP w0.381: C16.1 51.07,49.15 D8.1 D9.2
N17136021: length 3.6
  TOP w0.381: D7.1 D6.2 52.42,42.04 C15.1
N17136250: length 3.6
  TOP w0.381: R18.1 55.71,38.43 C18.1 54.65,38.43 D7.2
N17136498: length 2.7
  TOP w0.381: D9.1 52.8,54.39 C17.1 52.86,54.46 R17.1
N17147084: length 27.1
  TOP w0.635: TP6.1 94.09,23.32 92.87,22.1 79.56,22.1 74.66,27 D12.1

## Copper pours and planes (outline as drawn; the poured copper is in the pictures)
GND on TOP: 1,0.2 0.43,0.43 0.2,1 0.2,99 0.43,99.57 1,99.8 164,99.8 164.57,99.57 164.8,99 164.8,1 164.57,0.43 164,0.2 ; 6 cut-outs
GND on BOTTOM: 1,0.2 0.43,0.43 0.2,1 0.2,99 0.43,99.57 1,99.8 164,99.8 164.57,99.57 164.8,99 164.8,1 164.57,0.43 164,0.2 ; 1 cut-out
VCC_5V on TOP (solid shape): 42.18,35.16 42.18,33.46 41.98,33.26 38.38,33.26 38.38,33.46 40.28,35.36 41.98,35.36

## Text on the board
Ref Des/Silkscreen Top: 5V INPUT | VDD | VCOM | AVDD | VGL | VGH | GND | 5V | SHLR | UP/DN | RST_LCD | PWM | RST_TP | INT_TP | TO ESP32-P4 MIPI | ESP32-P4 HMI SubBoard V1.2 | Applicable to ESP32-P4 Function EV Board V1.2/1.3
User.8: FIGURE | SIZE | 0.254 | 1.0 | 4.22 | 0.6 | 1.4x0.6 | 1.7x0.6 | DRILL CHART: TOP to BOTTOM | ALL UNITS ARE IN MILLIMETERS | TOLERANCE | +0.0762/-0.0762 | +0.0/-0.0 | PLATED | NON-PLATED | QTY | 833 | 4 | 8 | 2
